# Altium PCB PCB1.PcbDoc
Units mm, origin at the board's own origin, x right, y up, seen from the top; angles counter-clockwise.
Board outline 78.1 x 50 mm, 2 copper layers (Top Layer, Bottom Layer); 33 components, 19 nets, 71 pads, 0 vias.
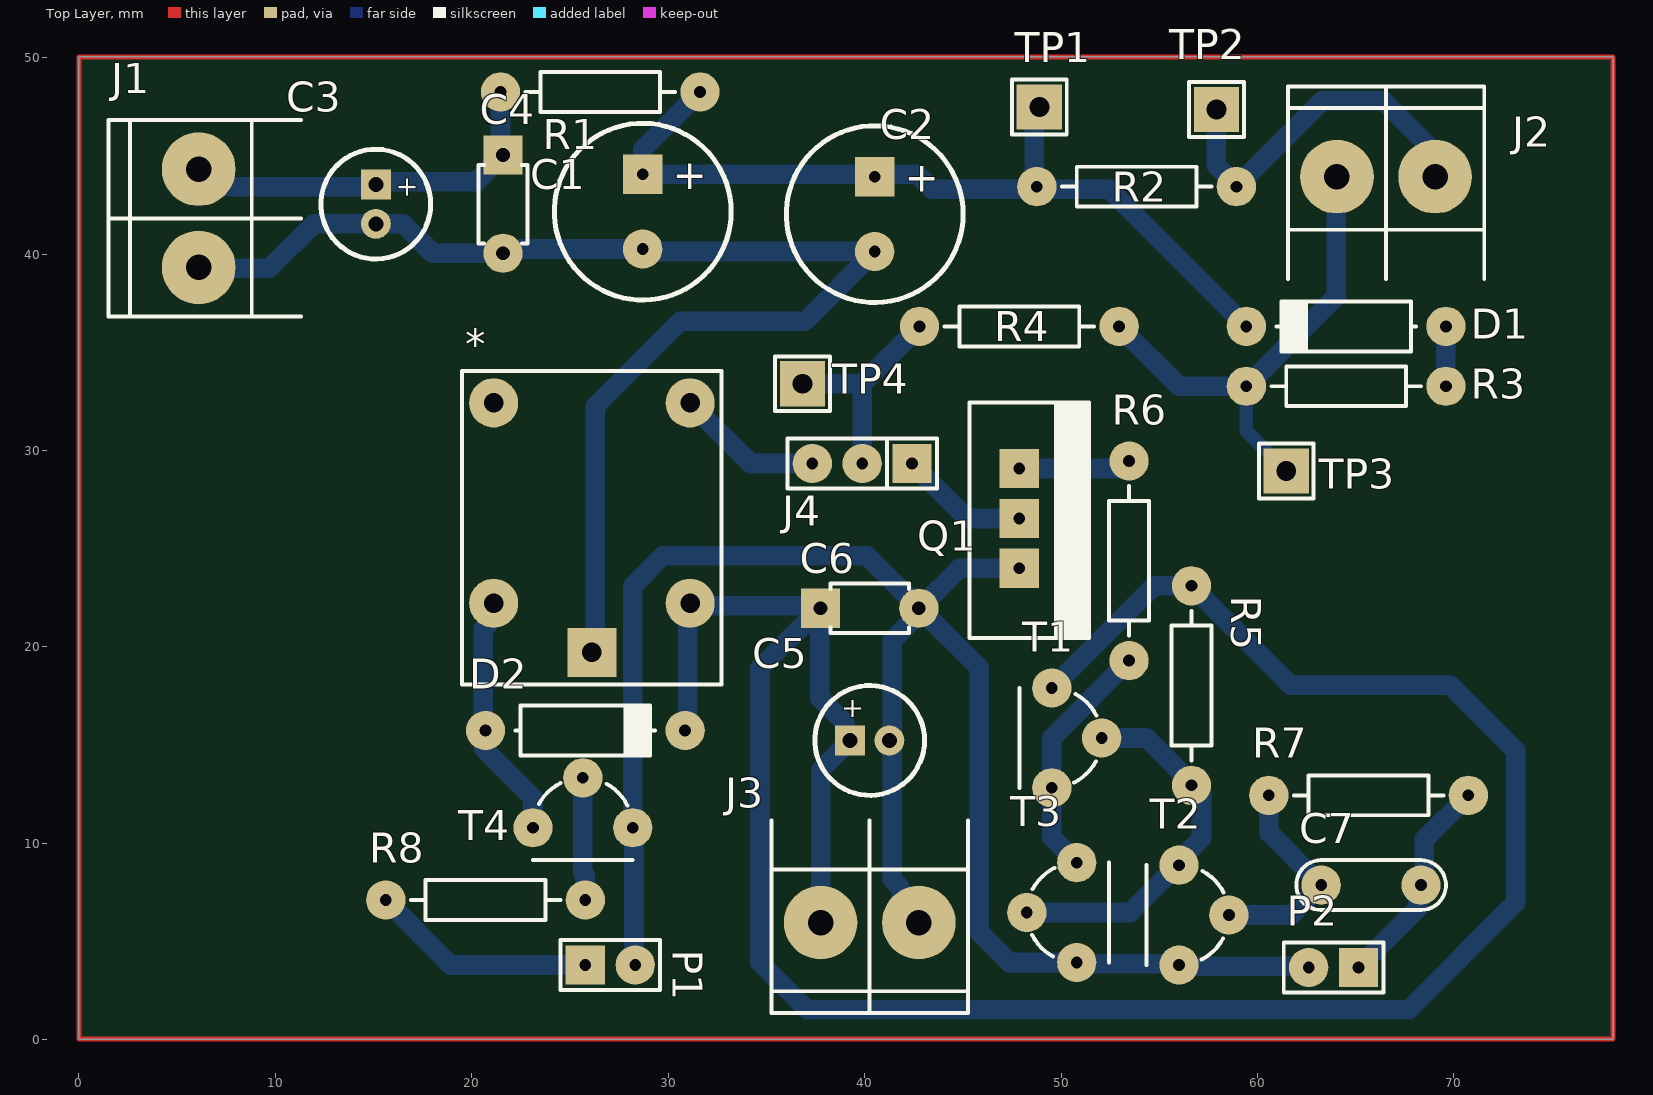
[diagram p0: Top Layer view]
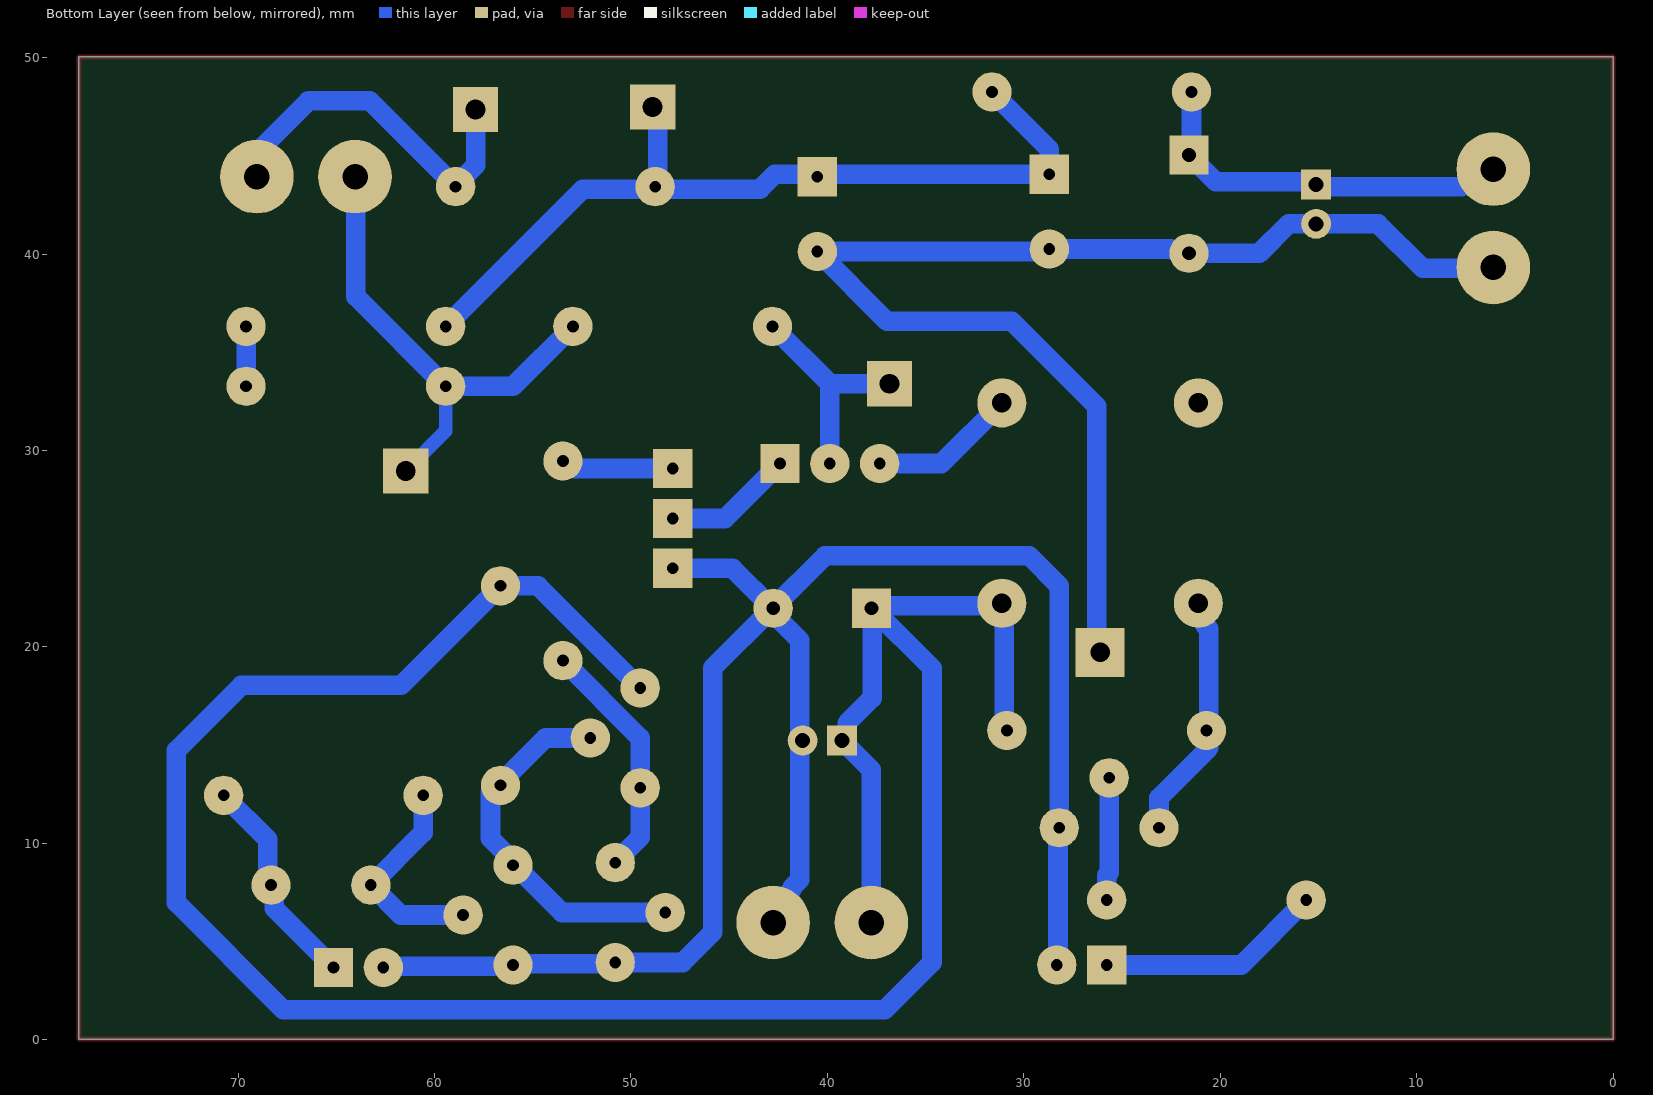
[diagram p1: Bottom Layer view, seen from below]
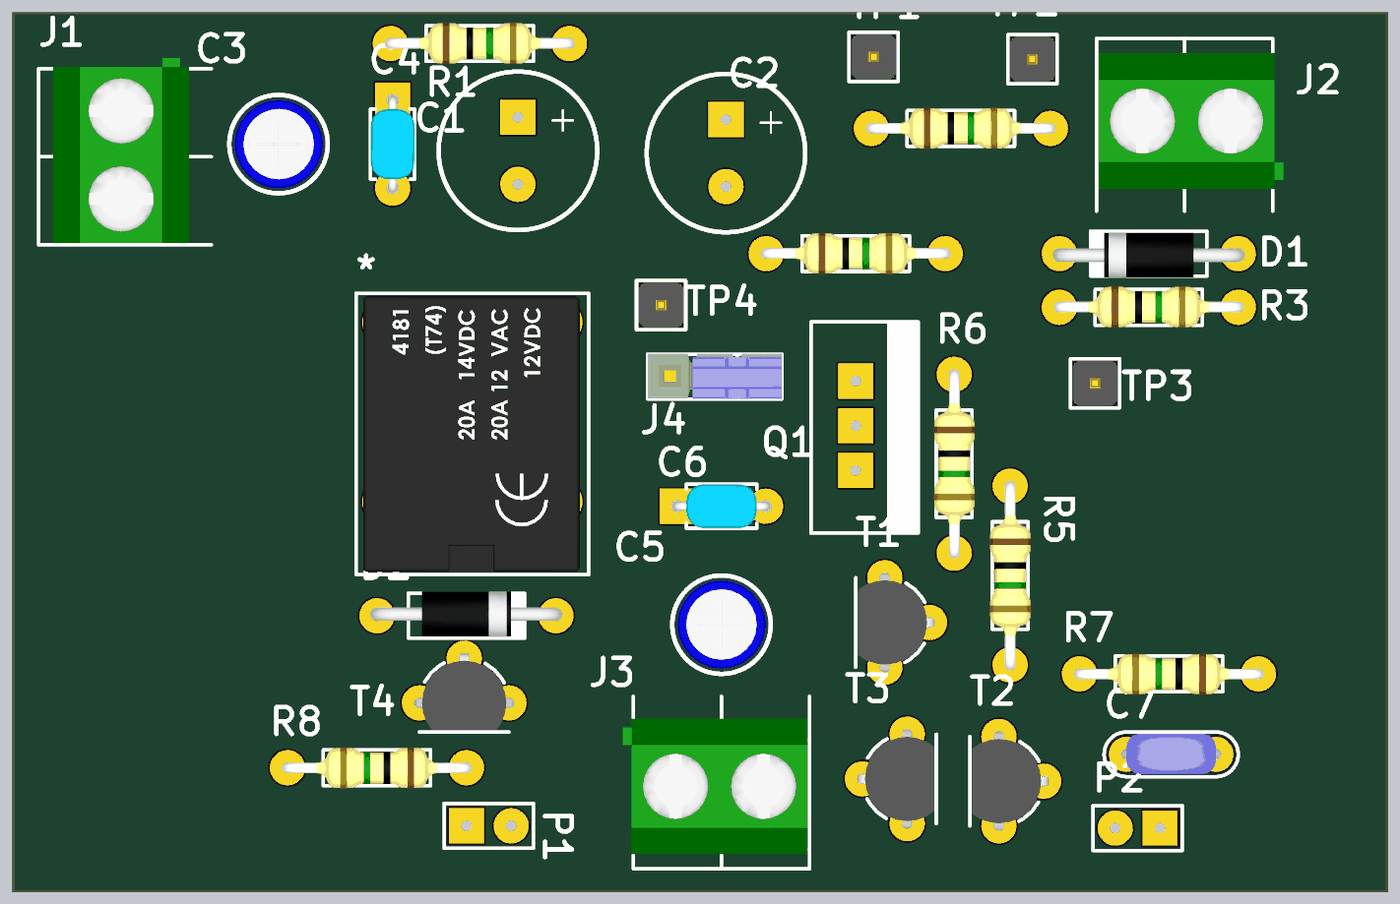
[diagram p2: 3D render of the assembled board from above, using the file's embedded part models]

## Layer stack, top to bottom
Top Solder: solder mask 0.0102, Solder Resist, Dk 3.5
Top Layer: signal copper 0.0356
Dielectric 1: dielectric 0.32, FR-4, Dk 4.8
Bottom Layer: signal copper 0.0356
Bottom Solder: solder mask 0.0102, Solder Resist, Dk 3.5

## Board outline
0,0.038 0,50.038 78.105,50.038 78.105,0.038

## Design rules (kind name [scope] priority, off if disabled: settings)
Clearance [All] p1: gap=0.254 ignorepadtopadclearanceinfootprint=FALSE
PolygonConnect [All] p1: connectstyle=Relief reliefconductorwidth=0.254 reliefentries=4 polygonreliefangle="90 Angle" airgapwidth=0.254
RoutingVias [All] p1: holewidth=0.711 width=1.5 viastyle="Through Hole" minholewidth=0.711 minwidth=1.27 maxholewidth=0.711 maxwidth=2
SolderMaskExpansion [All] p1: expansion=0.102 istentingtop=FALSE
SupplyNets "Schematic Supply Nets_8" [InNet('+5.R')] p1: voltage=0.000
SupplyNets "Schematic Supply Nets_7" [InNet('+5.M')] p2: voltage=0.000
SupplyNets "Schematic Supply Nets_6" [InNet('Sin')] p3: voltage=0.000
SupplyNets "Schematic Supply Nets_4" [InNet('+12')] p4: voltage=0.000
SupplyNets "Schematic Supply Nets_3" [InNet('GND')] p5: voltage=0.000
SupplyNets "Schematic Supply Nets_2" [InNet('+60')] p6: voltage=0.000
SupplyNets "Schematic Supply Nets_1" [InNet('GND2')] p7: voltage=0.000
SupplyNets "Schematic Supply Nets" [InNet('So')] p8: voltage=0.000
Width [All] p1: maxlimit=1.5 minlimit=0.254 preferedwidth=0.7 minimp=50.000000 maximp=50.000000 favimp=50.000000
30 further rules are at their usual default settings.

## Components (designator, comment, footprint, x,y, rotation, side; value= is the part's Value field where it differs from the comment)
* "RELE SIMPLE" "RELE SERIE 964" 26.115,26.075 r90 top
C1 "470u" CAP300RP 28.702,42.164 r270 top
C2 "470u" CAP300RP 40.513,42.037 r270 top
C3 "CAPPOL" CAP100RP 15.113,42.545 r270 top
C4 "RCEC72A105K1M1H03A" FP-RCE1M1-MFG 21.59,42.545 r270 top
C5 "CAPPOL" CAP100RP 40.259,15.24 r0 top
C6 "RCEC72A105K1M1H03A" FP-RCE1M1-MFG 40.259,21.971 r0 top
C7 "CAP" CAP200 65.786,7.874 r180 top
D1 "DIODO" DO41 64.516,36.322 r180 top
D2 "DIODO" DO41 25.781,15.748 r0 top
J1 "BORNERA 2" BORNERA2 6.096,41.823 r0 top
J2 "BORNERA 2" BORNERA2 66.548,43.942 r270 top
J3 "BORNERA 2" BORNERA2 40.259,5.969 r90 top
J4 "JUMPER" JUMPER3 39.878,29.337 r180 top
P1 "Header 2" HDR1X2 25.781,3.81 r0 top
P2 "Header 2" HDR1X2 65.151,3.683 r180 top
Q1 "MOSFET N" "TO-220 V" 47.879,26.543 r270 top
R1 "1200" RES400 21.463,48.26 r0 top
R2 "10" RES400 48.768,43.434 r0 top
R3 "390" RES400 59.436,33.274 r0 top
R4 "10" RES400 42.799,36.322 r0 top
R5 "2.2k" RES400 56.642,23.114 r270 top
R6 "47" RES400 53.467,29.464 r270 top
R7 "470" RES400 70.739,12.446 r180 top
R8 "RES" RES400 25.781,7.112 r180 top
T1 "TRANSISTOR NPN" TO92 50.8,15.367 r90 top
T2 "TRANSISTOR NPN" TO92 57.277,6.35 r90 top
T3 "TRANSISTOR PNP" TO92 49.53,6.477 r270 top
T4 "TRANSISTOR NPN" TO92 25.654,12.065 r180 top
TP1 "TP" TPTH 48.895,47.498 r180 top
TP2 "TP" TPTH 57.912,47.371 r180 top
TP3 "TP" TPTH 61.468,28.956 r90 top
TP4 "TP" TPTH 36.83,33.401 r90 top

## Footprints (in the part's own frame and the unit in brackets; to place one, negate y for a bottom-side part, rotate by r counter-clockwise, add the part's x,y. Pads: shape width x height; smd on the part's side, far side on the other; paste and mask are expansions set on the pad)
BORNERA2 [mm] "Bornera con Tornillos 5mm separación"
  round 3.75 hole 1.3: 1(0,2.5) 2(0,-2.5)
  silkscreen extent -4.6,-5 5.2,5, body extent -3.76,-4.89 3.94,5.61, height 10
CAP100RP [mil] "Body diameter 5mm"
  rect 60x60 hole 30: 1(-39.37,0)
  round 60 hole 30: 2(39.37,0)
  silkscreen extent -110,-110 110,110, body extent -99,-99 99,100, height 454
CAP200 [mm]
  round 2 hole 0.6: 1(-2.54,0) 2(2.54,0)
  silkscreen extent -3.81,-1.27 3.81,1.27, body extent -2.79,-1.17 2.79,1.12, height 6.24
CAP300RP [mm]
  rect 2x2 hole 0.6: 1(-1.905,0)
  round 2 hole 0.6: 2(1.905,0)
  silkscreen extent -4.5,-4.5 4.5,4.5
DO41 [mm]
  round 2 hole 0.6: 1(-5.08,0) 2(5.08,0)
  silkscreen extent -3.56,-1.27 3.56,1.27, body extent -5.46,-1.19 5.46,1.37, height 2.03
FP-RCE1M1-MFG [mm]
  rect 2x2 hole 0.7: 1(-2.5,0)
  round 2 hole 0.7: 2(2.5,0)
  silkscreen extent -2,-1.25 2,1.25, body extent -3.2,-1.35 3.2,1.35, height 0.25
HDR1X2 [mm] "Connector; Header; 2 Position"
  rect 2x2 hole 0.6: 1(0,0)
  round 2 hole 0.6: 2(2.54,0)
  silkscreen extent -1.27,-1.27 3.81,1.27
JUMPER3 [mm]
  rect 2x2 hole 0.6: 1(-2.54,0)
  round 2 hole 0.6: 2(0,0) 3(2.54,0)
  silkscreen extent -3.81,-1.27 3.81,1.27, body extent -3.81,-1.3 3.81,1.27, height 16.15
"RELE SERIE 964" [mm]
  round 2.5 hole 1: B1(-3.85,-5) B2(-3.85,5) NA1(6.35,-5) NC1(6.35,5)
  rect 2.5x2.5 hole 1: C1(-6.35,0)
  silkscreen extent -7.99,-6.6 7.99,6.6, body extent -7.85,-6.1 7.85,6.2, height 13.66
RES400 [mm]
  round 2 hole 0.6: 1(0,0) 2(10.16,0)
  silkscreen extent 1.27,-1.02 8.89,1.02, body extent -0.3,-1.14 10.46,1.17, height 2.43
TO92 [mm]
  round 2 hole 0.6: 1(0,-1.27) 2(2.54,1.27) 3(-2.54,1.27)
  silkscreen extent -2.54,-1 2.54,2.92, body extent -2.79,-1.55 2.79,2.79, height 8
"TO-220 V" [mm]
  rect 2x2 hole 0.6: 1(-2.54,0) 2(0,0) 3(2.54,0)
  silkscreen extent -5.9,-2.54 6.1,3.54, body extent -5,-2 5,3, height 18
TPTH [mm]
  rect 2.3x2.3 hole 1.016: 1(0,0)
  silkscreen extent -1.4,-1.4 1.4,1.4, body extent -1.27,-1.27 1.27,1.27, height 6.04

## Part data
C1 C2: library part CAPPOL
C4 C6: library part CMP-00260-148573932-1, Capacitance=1µF, Case/Package=Radial, Max Operating Temperature=125°C, Min Operating Temperature=-55°C, Tolerance=10%, Voltage Rating=100V, Height=5mm, Lifecycle Status=Production, Material=Ceramic
J4: library part JUMPER3
P1 P2: "Header, 2-Pin", LatestRevisionDate=17-Jul-2002, LatestRevisionNote="Re-released for DXP Platform.", Publisher="Altium Limited"
R1 R2 R3 R4 R5 R6 R7: library part RES

## Nets (pads, with @x,y where several pads share a name; then routed paths per layer and width w, separated by ;. In a path a pad name is that pad's centre, name@x,y a point inside that pad or via, vN(x,y) a via of type N, cw(c..) or ccw(c..) an arc to the next point about the centre after c; other vN are vias at no path point)
+5.M: C7.1 P2.1 R7.1 | length 11.1
  Bottom Layer w1: P2.1 68.159,6.691 68.159,7.707 68.493,8.041 68.493,10.2 R7.1
+5.R: P1.1 R8.2 | length 11.5
  Bottom Layer w1: R8.2 18.923,3.81 P1.1
+12: *.B1 C5.1 C6.1 D2.2 J3.1 R5.1 T1.2 | length 127.9
  Bottom Layer w1: D2.2 30.988,15.875 30.988,22.098 *.B1 31.242,22.098 37.592,22.098 C6.1@37.719,21.971 ; J3.1 37.759,13.74 C5.1@38.806,14.787 ; C5.1 38.997,15.502 38.997,16.121 37.719,17.399 C6.1@37.719,21.971 ; T1.2 54.737,23.114 R5.1 61.708,18.048 69.836,18.048 73.146,14.738 73.146,6.979 67.691,1.524 37.084,1.524 34.671,3.937 34.671,18.923 C6.1@37.719,21.971
+60: C3.1 C4.1 J1.1 R1.1 | length 20.1
  Bottom Layer w1: J1.1 6.84,44.323 7.729,43.434 14.986,43.434 15.24,43.688 20.233,43.688 C4.1 ; C4.1@21.463,44.704 R1.1
GND: *.C1 C1.2 C2.2 C3.2 C4.2 J1.2 | length 66.4
  Bottom Layer w1: J1.2@6.096,39.283 9.692,39.283 11.954,41.545 C3.2 16.511,41.545 18.011,40.045 C4.2 ; C4.2@21.463,39.647 22.052,40.236 22.488,40.236 22.511,40.259 C1.2 28.829,40.132 C2.2@40.439,40.132 ; *.C1 26.289,19.899 26.289,32.258 30.607,36.576 36.957,36.576 C2.2
GND2: C5.2 C6.2 J3.2 P1.2 P2.2 Q1.3 T2.3 T3.2 T4.3 | length 94
  Bottom Layer w1: P1.2 28.258,3.873 28.258,9.271 28.258,10.731 T4.3 28.194,23.114 29.718,24.638 40.132,24.638 C6.2@42.799,21.971 ; J3.2 42.759,6.713 41.785,7.687 41.785,7.768 41.402,8.151 41.402,14.726 41.359,14.769 41.359,15.197 41.402,15.24 41.359,15.283 41.359,15.711 41.402,15.754 41.402,20.337 42.799,21.734 C6.2@42.799,21.971 ; Q1.3 44.831,24.003 C6.2@42.799,21.971 ; T2.3@55.944,3.873 50.863,3.873 T3.2 47.371,3.937 45.838,5.47 45.838,18.932 C6.2@42.799,21.971 ; T2.3 56.07,3.746 62.547,3.746 P2.2
Net*_B2: *.B2 D2.1 T4.2 | length 12.7
  Bottom Layer w1: *.B2 20.771,21.881 20.771,21.112 20.574,20.915 20.574,18.161 20.574,17.526 20.574,16.256 20.574,14.859 23.114,12.319 T4.2
Net*_NA1: *.NA1 J4.3 | length 7.5
  Bottom Layer w1: *.NA1 34.203,29.337 J4.3
NetC1_1: C1.1 C2.1 D1.2 R1.2 R2.1 TP1.1 | length 43.9
  Bottom Layer w1: R1.2 28.702,45.339 C1.1 42.672,44.069 43.434,43.307 48.768,43.307 52.451,43.307 D1.2@59.627,36.131 ; R2.1@48.641,43.307 48.641,47.244 TP1.1
NetC7_2: C7.2 R7.2 T2.1 | length 11.1
  Bottom Layer w1: T2.1 61.722,6.35 C7.2 60.579,10.541 R7.2@60.579,12.551
NetD1_1: D1.1 R3.2 | length 4.1
  Bottom Layer w1: R3.2@69.469,33.274 69.469,32.893 69.596,32.766 R3.2 D1.1
NetJ4_1: J4.1 Q1.2 | length 6.6
  Bottom Layer w1: J4.1 45.212,26.543 Q1.2
NetJ4_2: J4.2 R4.1 TP4.1 | length 11.2
  Bottom Layer w1: TP4.1 39.878,33.401 ; J4.2 39.878,33.401 ; R4.1 39.878,33.401
NetQ1_1: Q1.1 R6.1 | length 5.7
  Bottom Layer w1: Q1.1 52.849,29.083 53.23,29.464 R6.1
NetR5_2: R5.2 T1.1 T2.2 T3.1 | length 19.1
  Bottom Layer w1: T3.1 53.509,6.477 55.922,8.89 T2.2 56.007,9.113 57.15,10.256 57.15,12.573 54.356,15.367 T1.1
NetR6_2: R6.2 T1.3 T3.3 | length 12.4
  Bottom Layer w1: T3.3 50.8,9.04 49.53,10.31 T1.3 49.53,15.367 R6.2
NetR8_1: R8.1 T4.1 | length 6.3
  Bottom Layer w1: T4.1 25.654,8.509 25.781,8.382 R8.1
Sin: J2.1 R2.2 TP2.1 | length 17.3
  Bottom Layer w1: TP2.1 57.912,44.52 58.928,43.504 R2.2 63.297,47.803 66.417,47.803 J2.1@69.008,45.212
So: J2.2 R3.1 R4.2 TP3.1 | length 26.7
  Bottom Layer w0.7: R3.1 59.436,30.988 TP3.1
  Bottom Layer w1: R4.2@52.959,36.559 R4.2 56.007,33.274 R3.1@59.199,33.274 ; R3.1 64.008,37.846 J2.2@64.008,45.212
pads on no net: *.NC1
copper on no net: | length 256.2
  Top Layer w0.254: 0,0.038 78.105,0.038 78.105,50.038 0,50.038 0,0.038

## Text inside footprints (layer, text, board x,y; h text height)
C1: Top Overlay "+" at 30.226,43.307 h1.52
C2: Top Overlay "+" at 42.037,43.18 h1.52
C3: Top Overlay "+" at 16.281,43.993 h1.02 r270
C5: Top Overlay "+" at 38.811,16.408 h1.02